# Altium PCB PCB1.pcbdoc
Units mil, origin at the board's own origin, x right, y up, seen from the top; angles counter-clockwise.
Board outline 1574.8 x 1574.8 mil, 2 copper layers (Top Layer, Bottom Layer), stack 62.2 mil thick; 42 components, 24 nets, 130 pads, 97 vias.
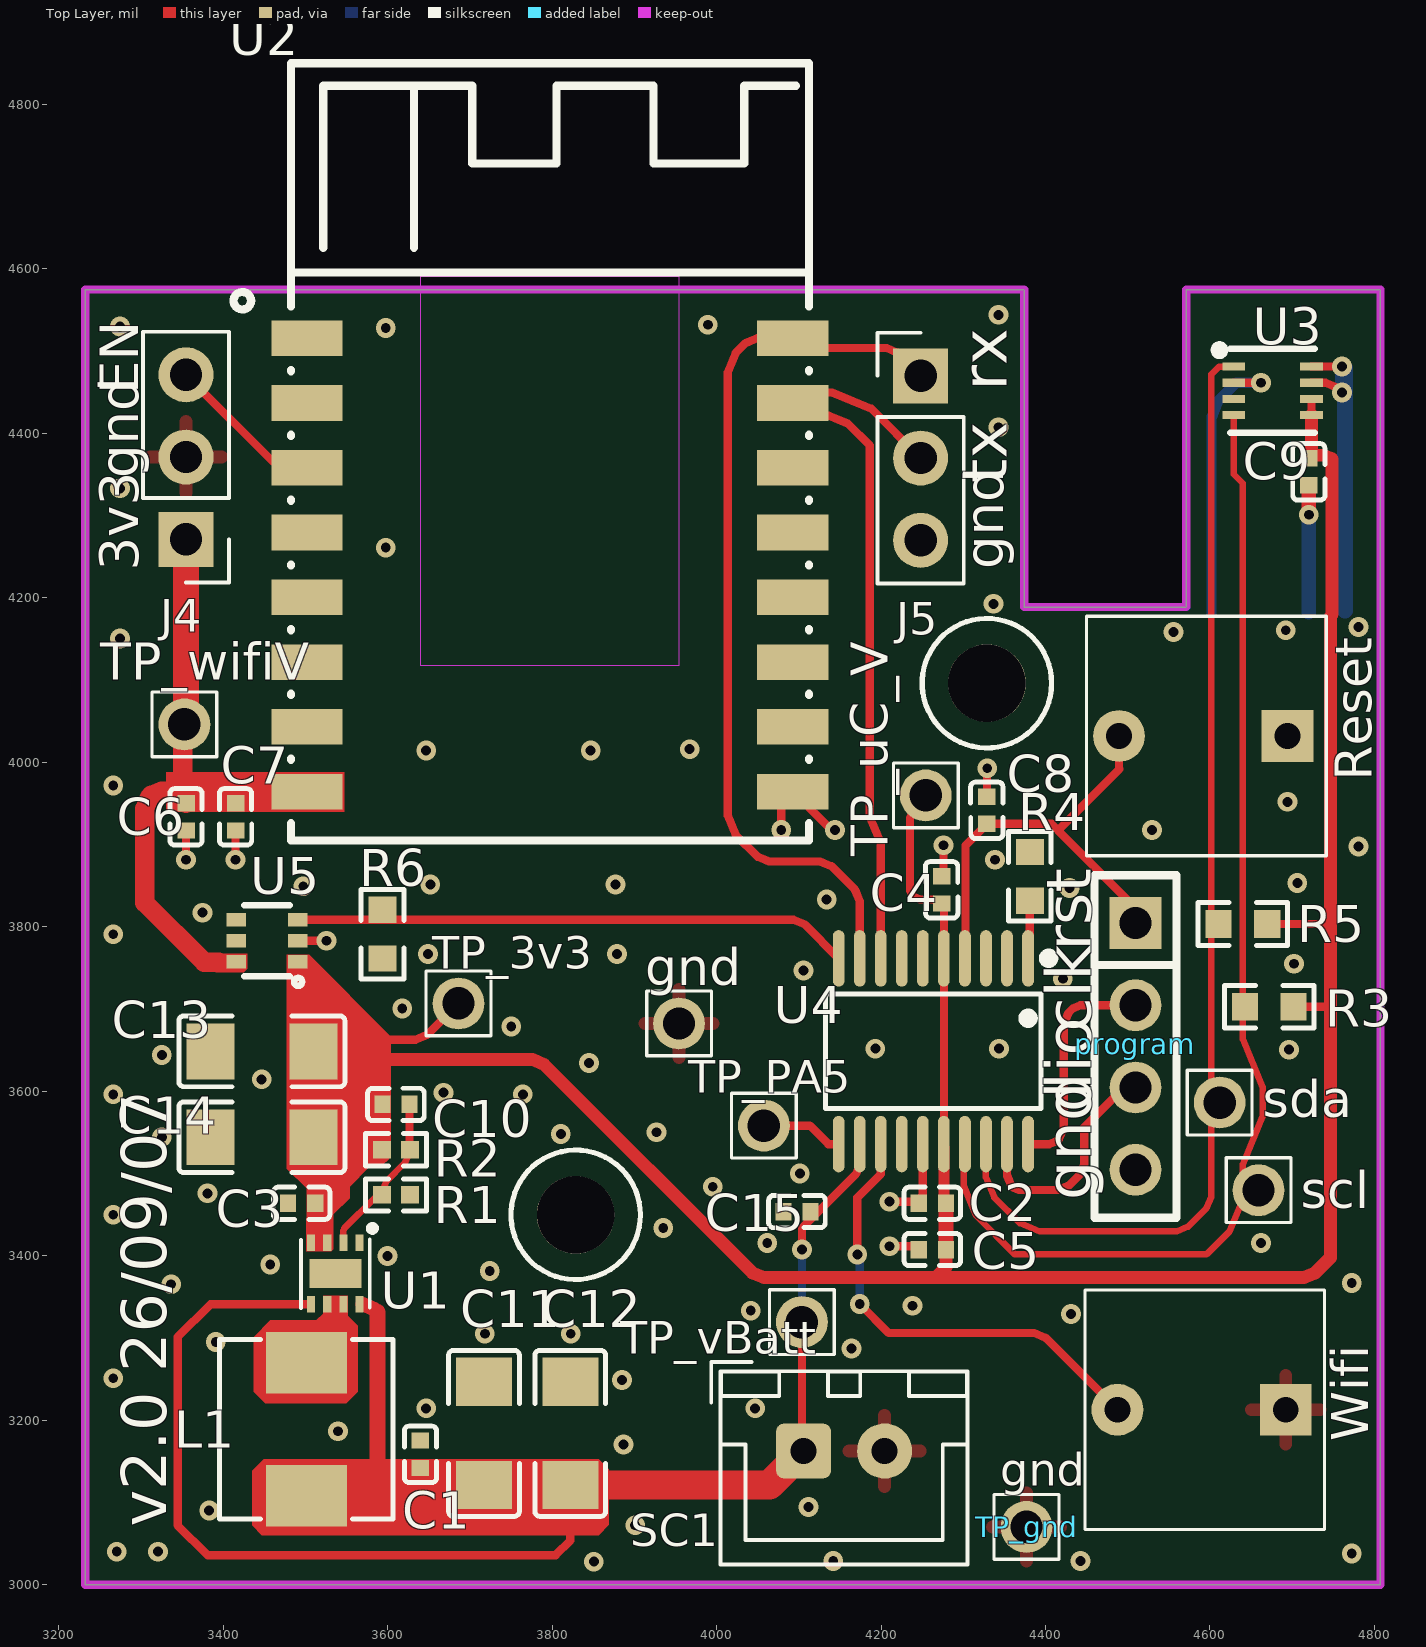
[diagram p0: Top Layer view]
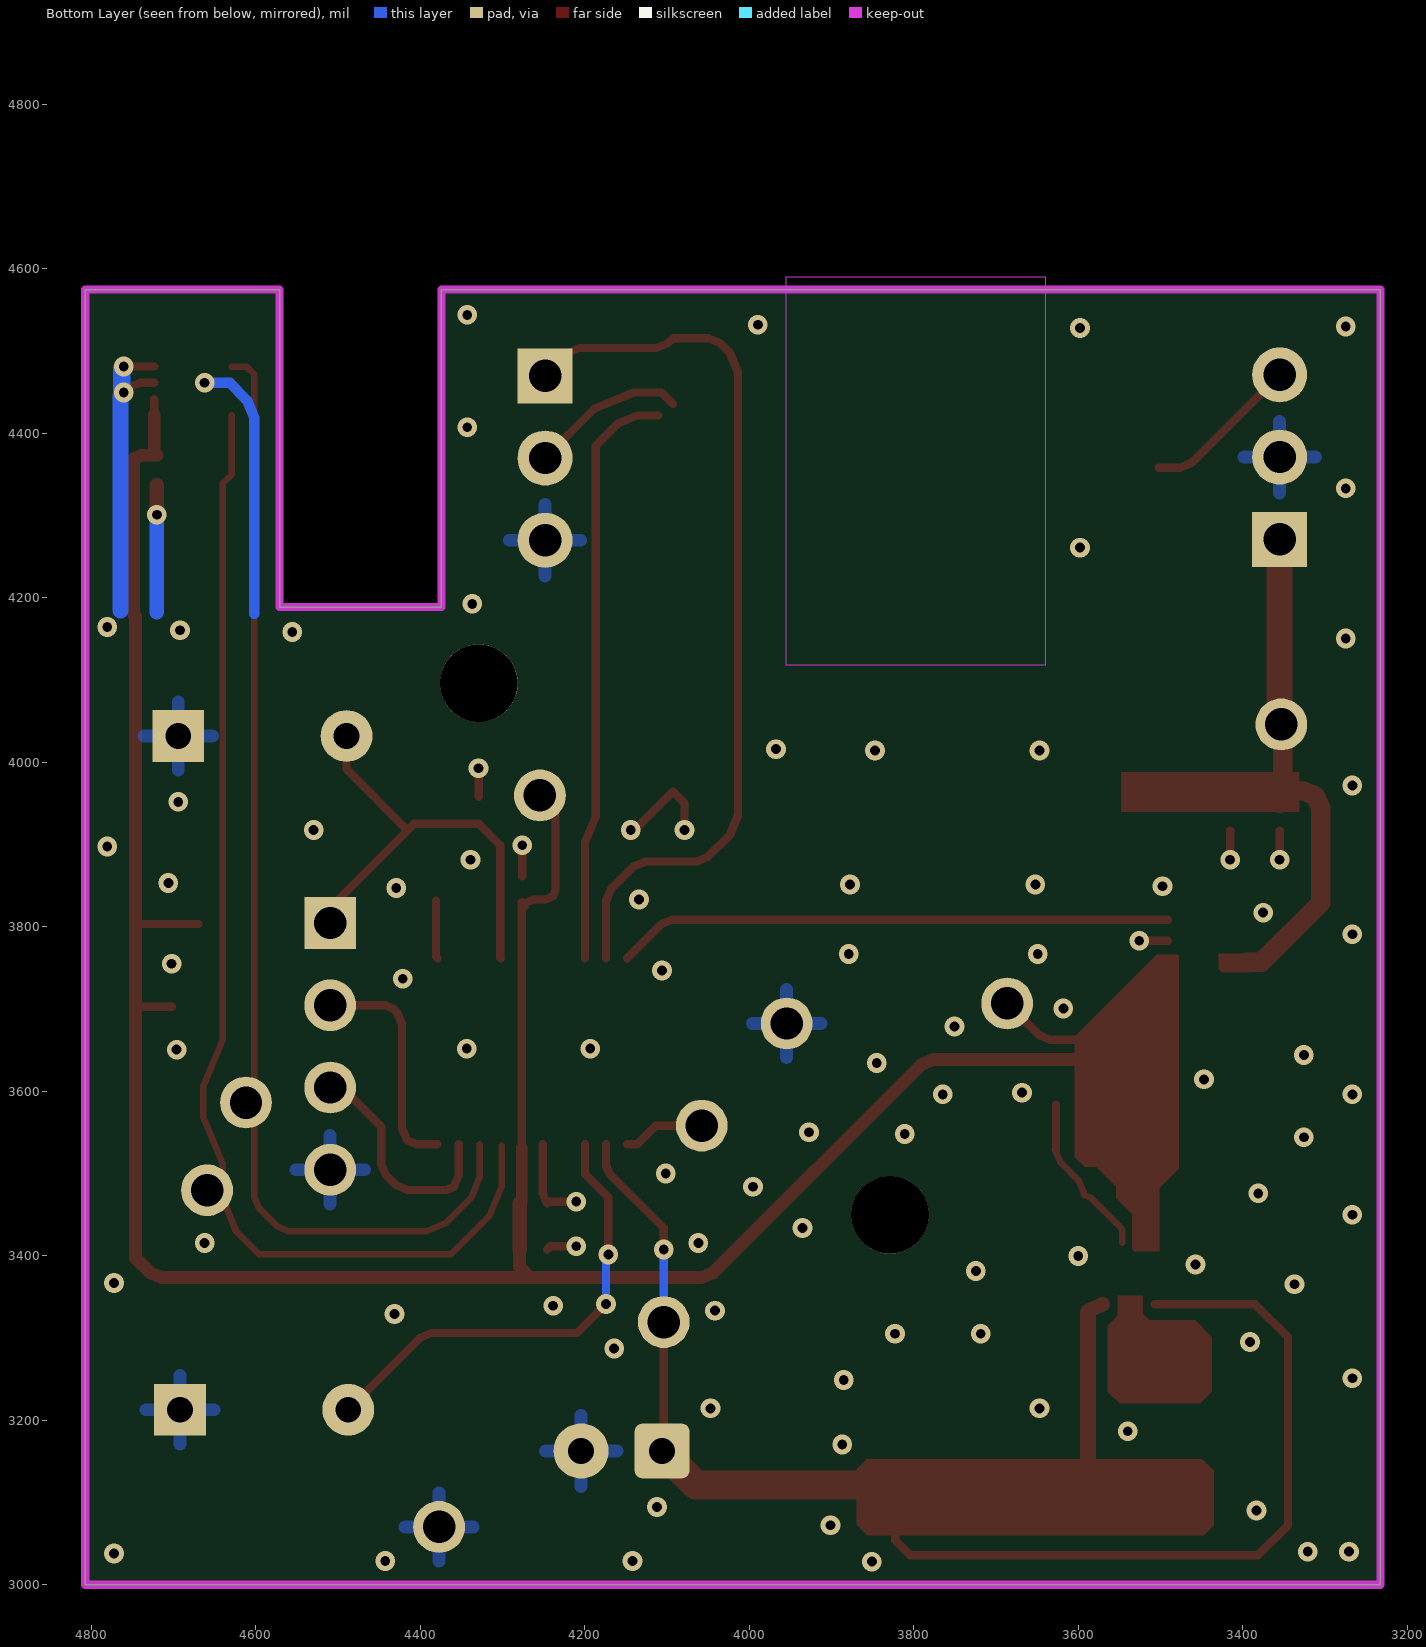
[diagram p1: Bottom Layer view, seen from below]

## Layer stack, top to bottom
Top Solder Mask Layer: solder mask 0.4, Dk 3.3
Top Layer: signal copper 1.4
Dielectric1: surface 59.4, FR4, Dk 4.5
Bottom Layer: signal copper 1.4
Bottom Solder Mask Layer: solder mask 0.4, Dk 3.3

## Board outline
4807.2,4574.8 4807.2,3000 3232.4,3000 3232.4,4574.8 4374.1,4574.8 4374.1,4188.8 4571,4188.8 4571,4574.8

## Design rules (kind name [scope] priority, off if disabled: settings)
BoardOutlineClearance copperThickness1oz [All] p0: genericclearance=10 ignorepadtopadclearanceinfootprint=FALSE except(0: Arc-SplitContinuation Track-SplitContinuation SMDPad-SplitContinuation THPad-SplitContinuation Via-SplitContinuation Fill-SplitContinuation Poly-SplitContinuation Region-SplitContinuation Text-SplitContinuation)
BoardOutlineClearance copperThickness2oz [All] p0: genericclearance=10 ignorepadtopadclearanceinfootprint=FALSE except(0: Arc-SplitContinuation Track-SplitContinuation SMDPad-SplitContinuation THPad-SplitContinuation Via-SplitContinuation Fill-SplitContinuation Poly-SplitContinuation Region-SplitContinuation Text-SplitContinuation)
BoardOutlineClearance otherClearance [All] p0: genericclearance=10 ignorepadtopadclearanceinfootprint=FALSE except(0: Arc-SplitContinuation Track-SplitContinuation SMDPad-SplitContinuation THPad-SplitContinuation Via-SplitContinuation Fill-SplitContinuation Poly-SplitContinuation Region-SplitContinuation Text-SplitContinuation)
Clearance copperThickness1oz [All] p1: gap=7 ignorepadtopadclearanceinfootprint=FALSE
Clearance copperThickness2oz [All] p1: gap=7 ignorepadtopadclearanceinfootprint=FALSE
Clearance otherClearance [All] p1: gap=7 ignorepadtopadclearanceinfootprint=FALSE
DiffPairsRouting differentialPair [All] p1: maxuncoupledlength=10 minlimit=6 maxlimit=Infinity mostfreqgap=6 toplayer_minwidth=5 toplayer_prefwidth=10 toplayer_maxwidth=100 bottomlayer_minwidth=5 bottomlayer_prefwidth=10 bottomlayer_maxwidth=100
PasteMaskExpansion pasteMaskExpansion [All] p1: expansion=0
PlaneConnect innerPlane [All] p1: planeconnectstyle=Relief reliefexpansion=20 reliefentries=4 reliefconductorwidth=10 reliefairgap=10
PolygonConnect copperRegion [All] p1: connectstyle=Relief reliefentries=4 reliefconductorwidth=15.748 polygonreliefangle="90 Angle" airgapwidth=10
RoutingVias viaSize [All] p1: viastyle="Through Hole" holewidth=12.0078 minholewidth=11.811 maxholewidth=248.0314 width=12.0078 minwidth=11.811 maxwidth=248.0314
SolderMaskExpansion solderMaskExpansion [IsVia] p1: useseparateexpansions=TRUE expansion=-1000 expansionbottom=-1000
SolderMaskExpansion solderMaskExpansion [All] p2: useseparateexpansions=TRUE expansion=2 expansionbottom=2
Width copperThickness1oz [All] p1: maxlimit=100 minlimit=5 preferedwidth=10
Width copperThickness2oz [All] p1: maxlimit=100 minlimit=8 preferedwidth=10

## Components (designator, comment, footprint, x,y, rotation, side; value= is the part's Value field where it differs from the comment)
C1 "10uF" C0402#1 3640,3158.6 r270 top
C2 "100nF" C0402#2 4262.4,3463.8 r0 top
C3 "10uF" C0402#2 3495.4,3463.8 r0 top
C4 "100nF" C0402#1 4273.7,3844.9 r270 top
C5 "10uF" C0402#2 4262.4,3407.6 r0 top
C6 "10uF" C0402#1 3354.9,3933.7 r90 top
C7 "100nF" C0402#1 3415.1,3933.7 r90 top
C8 "100nF" C0402#3 4328.7,3941.7 r270 top
C9 "100nF" C0402#3 4720.2,4353.3 r90 top
C10 "50pF" C0402#3 3610.2,3584 r180 top
C11 "47uF" C1206 3717.2,3184.1 r270 top
C12 "47uF" C1206 3822.2,3184.1 r270 top
C13 "47uF" C1206 3447.2,3648.5 r0 top
C14 "47uF" C1206 3447.2,3544.1 r0 top
C15 "100nF" C0402#3 4097.8,3453.8 r0 top
gnd "" HDR-TH_1P-P2.54-V-F 3954.3,3682.4 r0 top
J4 "Connector_Generic_Conn_01x03" Connector_PinHeader_2.54mm:PinHeader_1x03_P2.54mm_Vertical 3354.9,4271.2 r180 top
J5 "Connector_Generic_Conn_01x03" Connector_PinHeader_2.54mm:PinHeader_1x03_P2.54mm_Vertical 4248.1,4470 r0 top
L1 "470nH" IND-SMD_L5.4-W5.2 3501.2,3189 r270 top
program "DS1023-1*4S21" HDR-TH_DS1023-1X4S21 4509.4,3654.6 r270 top
R1 "200kΩ" R0402 3610.2,3474 r180 top
R2 "634kΩ" R0402 3610.2,3529 r180 top
R3 "10kΩ" R0603#1 4672,3702.8 r0 top
R4 "10kΩ" R0603#1 4380.9,3861.4 r270 top
R5 "10kΩ" R0603#1 4639.9,3803.4 r0 top
R6 "10kΩ" R0603#2 3593.8,3791.1 r90 top
Reset "Switch_SW_Push" water_tank:SW_PUSH 4694.1,4032 r180 top
SC1 "Device_Solar_Cell" water_tank:JST_XH_B2B-XH-A_1x02_P2.50mm_Vertical 4105.8,3162.6 r0 top
scl "" HDR-TH_1P-P2.54-V-F 4659,3479.7 r0 top
sda "" HDR-TH_1P-P2.54-V-F 4611.8,3586.3 r0 top
TP_3v3 "" HDR-TH_1P-P2.54-V-F 3686.2,3706.8 r0 top
TP_gnd "" HDR-TH_1P-P2.54-V-F 4376.9,3070.3 r0 top
TP_PA5 "" HDR-TH_1P-P2.54-V-F 4057.6,3558.2 r0 top
TP_uC_V "" HDR-TH_1P-P2.54-V-F 4254.4,3959.8 r0 top
TP_vBatt "" HDR-TH_1P-P2.54-V-F 4103.8,3319.3 r0 top
TP_wifiV "" HDR-TH_1P-P2.54-V-F 3352.9,4046.1 r0 top
U1 "TPS61021ADSGR" WSON-8_L2.0-W2.0-P0.50-TL-EP 3536.5,3378.4 r270 top
U2 "" T3-3S-footprint 3797.4,4240 r0 top
U3 "HDC3020DEFR" DFN-8_L2.5-W2.5-P0.50-BL-EP 4676.1,4451.7 r270 top
U4 "STM32L010F4P6" TSSOP-20_L6.5-W4.4-P0.65-LS6.4-BL 4263.6,3648.7 r180 top
U5 "TPS22919QDCKRQ1" SC-70-6_L2.0-W1.3-P0.65-LS2.1-BR 3453.3,3783.1 r0 top
Wifi "Switch_SW_Push" water_tank:SW_PUSH 4692.1,3212.8 r180 top

## Footprints (in the part's own frame and the unit in brackets; to place one, negate y for a bottom-side part, rotate by r counter-clockwise, add the part's x,y. Pads: shape width x height; smd on the part's side, far side on the other; paste and mask are expansions set on the pad)
C0402#1 [mil]
  rect 19.7x21.3 smd: 1(-16.6,0) 2(16.5,0)
  silkscreen extent -34,-20 34,20
C0402#2 [mil]
  rect 19.7x21.3 smd: 1(-16.5,0) 2(16.6,0)
  silkscreen extent -34,-20 34,20
C0402#3 [mil]
  rect 19.7x21.3 smd: 1(-16.5,0) 2(16.5,0)
  silkscreen extent -34,-20 34,20
C1206 [mil]
  rect 58.5x68 smd paste-3937 mask+2: 1(-62.7,0) 2(62.7,0)
  silkscreen extent -101,-43 101,43
Connector_PinHeader_2.54mm:PinHeader_1x03_P2.54mm_Vertical [mil]
  rect 66.9x66.9 hole 39.4 paste+0 mask+0: 1(0,0)
  round 66.9 hole 39.4 paste+0 mask+0: 2(0,-100) 3(0,-200)
  silkscreen extent -52,-252 52,52
DFN-8_L2.5-W2.5-P0.50-BL-EP [mil]
  rect 9.8x27.6 smd: 1(-29.5,-47.3) 2(-9.8,-47.3) 3(9.8,-47.3) 4(29.5,-47.3) 5(29.5,47.2) 6(9.8,47.2) 7(-9.8,47.2) 8(-29.5,47.2)
  silkscreen extent -55,-70 51,51
HDR-TH_1P-P2.54-V-F [mil]
  round 63 hole 39.4 paste+0 mask+2: 1(0,0)
  silkscreen extent -39,-39 39,39
HDR-TH_DS1023-1X4S21 [mil]
  rect 63x63 hole 39.4: 1(-150,0)
  round 63 hole 39.4: 2(-50,0) 3(50,0) 4(150,0)
  silkscreen extent -208,-50 208,50
IND-SMD_L5.4-W5.2 [mil]
  rect 74.8x98.4 smd: 1(80.7,0) 2(-80.7,0)
  silkscreen extent -109,-105 109,105
R0402 [mil]
  rect 22.3x21.3 smd paste-3937 mask+2: 1(-17,0) 2(17,0)
  silkscreen extent -37,-20 37,20
R0603#1 [mil]
  rect 31.8x34 smd paste-3937 mask+2: 1(-29.6,0) 2(29.7,0)
  silkscreen extent -54,-26 55,26
R0603#2 [mil]
  rect 31.8x34 smd paste-3937 mask+2: 1(-29.7,0) 2(29.7,0)
  silkscreen extent -54,-26 54,26
SC-70-6_L2.0-W1.3-P0.65-LS2.1-BR [mil]
  rect 23.6x16.5 smd: 1(37.4,-25.6) 2(37.4,0) 3(37.4,25.6) 4(-37.4,25.6) 5(-37.4,0) 6(-37.4,-25.6)
  silkscreen extent -28,-55 43,43
T3-3S-footprint [mil]
  rect 86.6x43.3 smd paste+0 mask+2: 1(-295.3,275.6) 2(-295.3,196.9) 3(-295.3,118.1) 4(-295.3,39.4) 5(-295.3,-39.4) 6(-295.3,-118.1) 7(-295.3,-196.9) 8(-295.3,-275.6) 9(295.3,-275.6) 10(295.3,-196.9) 11(295.3,-118.1) 12(295.3,-39.4) 13(295.3,39.4) 14(295.3,118.1) 15(295.3,196.9) 16(295.3,275.6)
  Board Outline Layer region: -157.5,350.4 -157.5,-122 157.5,-122 157.5,350.4
  silkscreen extent -385,-335 315,610
TSSOP-20_L6.5-W4.4-P0.65-LS6.4-BL [mil]
  oval 14.3x68.6 smd: 1(-115.2,-113) 2(-89.6,-113) 3(-64,-113) 4(-38.4,-113) 5(-12.8,-113) 6(12.8,-113) 7(38.4,-113) 8(63.9,-113) 9(89.5,-113) 10(115.1,-113) 11(115.1,113) 12(89.5,113) 13(63.9,113) 14(38.4,113) 15(12.8,113) 16(-12.8,113) 17(-38.4,113) 18(-64,113) 19(-89.6,113) 20(-115.2,113)
  silkscreen extent -146,-119 131,70
water_tank:JST_XH_B2B-XH-A_1x02_P2.50mm_Vertical [mil]
  rrect29% 66.9x66.9 hole 31.5 paste+0 mask+0: 1(0,0)
  round 66.9 hole 31.5 paste+0 mask+0: 2(98.5,0)
  silkscreen extent -112,-138 199,108
water_tank:SW_PUSH [mil]
  rect 63x63 hole 31.5 paste+0 mask+0: 1(0,0)
  round 63 hole 31.5 paste+0 mask+0: 2(204.7,0)
  silkscreen extent -47,-146 244,146
WSON-8_L2.0-W2.0-P0.50-TL-EP [mil]
  rect 20.5x9.8 smd paste+0 mask+2: 1(-37.4,29.5) 2(-37.4,9.8) 3(-37.4,-9.9) 4(-37.4,-29.6) 5(37.4,-29.6) 6(37.4,-9.9) 7(37.4,9.8) 8(37.4,29.5)
  rect 35.4x63 smd paste+0 mask+2: 9(0,0)
  silkscreen extent -58,-42 42,48

## Free pads (board coordinates)
  round 94.5 hole 94.5 unplated: 1(3828.7,3449.8) 1(4328.7,4096.2)

## Via types
v1: diameter 24, hole 12, Top Layer to Bottom Layer, 97 vias

## Nets (pads, with @x,y where several pads share a name; then routed paths per layer and width w, separated by ;. In a path a pad name is that pad's centre, name@x,y a point inside that pad or via, vN(x,y) a via of type N, cw(c..) or ccw(c..) an arc to the next point about the centre after c; other vN are vias at no path point)
$1N30: C6.2 C7.2 J4.1 TP_wifiV.1 U2.8 U5.6 | length 613.5
  Top Layer w23.6: TP_wifiV.1@3350.9,4044.1 3350.9,3965.1 ; C6.2 3354.9,3961.1 3350.9,3965.1 ; 3395,3757 3377,3757 3304.7,3829.3 3304.7,3943.6 3310.5,3957.5 3312.7,3959.8 3325.6,3965.1 3350.9,3965.1
  Top Layer w31.5: TP_wifiV.1 3354.9,4048.1 J4.1
$1N39: R4.2 U4.1 | length 70.8
  Top Layer w10: U4.1 4380.9,3763.9 R4.2
$1N45: J4.3 U2.3 | length 192.8
  Top Layer w10: J4.3 3462.2,4363.9 3476.1,4358.1 U2.3
$1N51: C10.1 R1.2 R2.1 U1.2 | length 201.3
  Top Layer w7.9: U1.2 3546.3,3430.5 3547.6,3433.7 3584.3,3470.3 R1.2 3593.2,3477.1 3598.9,3491 3621.5,3513.6 3627.2,3527.5 R2.1
  Top Layer w10: C10.1 3626.7,3530.2 R2.1
$1N61: L1.2 U1.6 U1.7
$1N79: U4.13 Wifi.2 | length 572.7
  Top Layer w10: v1(4171.2,3401.6) 4171.2,3471 4199.7,3499.4 U4.13 ; v1(4174.1,3341.3) 4209.3,3306.2 4385.9,3306.2 4399.8,3300.4 Wifi.2
  Bottom Layer w10: v1(4171.2,3401.6) 4174.1,3398.7 v1(4174.1,3341.3)
$1N80: TP_PA5.1 U4.11 | length 100.2
  Top Layer w10: TP_PA5.1 4113.4,3558.2 4135.9,3535.7 U4.11
+3V3: C2.2 C3.2 C4.2 C5.2 C9.2 C10.2 C13.2 C14.2 R2.2 R3.2 R5.2 TP_3v3.1 TP_uC_V.1 U1.3 U1.4 U3.5 U3.6 U4.5 U4.16 U5.1 | length 2171.5
  Top Layer w10: 3589.8,3662.6 3633.9,3662.6 ; TP_uC_V.1 4241.1,3946.4 4235.3,3932.5 4235.3,3845.3 4238.8,3836.8 4247.4,3833.3 4262,3833.3 ; U4.5 C4.2@4276.4,3829.8 ; R5.2 4744.3,3803.4 ; R3.2 4740.1,3702.8 4746.3,3709 ; U3.5 U3.6
  Top Layer w13.8: C2.2@4276.5,3465.3 U4.16@4276.5,3531.2 ; C2.2@4277.5,3465.3 C2.2
  Top Layer w15.7: 3790.3,3632.7 4043.8,3379.2 ; 4057.8,3373.5 4266.5,3373.5 ; C9.2@4720.2,4373.4 4738.2,4373.4 4747.8,4369.4 4748.3,4368.9 4748.3,4179.5 4746.3,4177.5 4746.3,3709 4746.3,3397.6 4728,3379.2 ; C9.2@4723.3,4377.3 U3.5
  Top Layer w17.7: C5.2 C2.2
+3v3:  | length 1029.7
  Top Layer w10: 3633.9,3662.6 3647.8,3668.4 3686.2,3706.8 ; 4262,3833.3 4273.7,3828.4 ; 4272.4,3824.9 4274.8,3827.3 4275.9,3828.4 ; 4276.4,3535.7 4276.4,3761.7
  Top Layer w15.7: 3591.8,3638.5 3776.4,3638.5 3790.3,3632.7 ; 4043.8,3379.2 4057.8,3373.5 ; 4279,3407.6 4279,3386 4266.5,3373.5 4714.1,3373.5 4728,3379.2
adc_batt: C1.2 C11.2 C12.2 C15.2 L1.1 SC1.1 TP_vBatt.1 U1.5 U1.8 U4.12 | length 481.5
  Top Layer w10: U1.8 U1.8@3569.9,3341 ; 3583.9,3335.2 3587.8,3331.3 ; TP_vBatt.1 4103.8,3176.7 SC1.1@4111.9,3168.7 ; v1(4103.8,3407.6) 4103.8,3433.7 4169.7,3499.6 4174.1,3510.1 U4.12
  Top Layer w17.7: U1.8@3569.9,3341 3583.9,3335.2
  Top Layer w35.4: 4064.5,3121.4 SC1.1
  Bottom Layer w10: TP_vBatt.1 v1(4103.8,3407.6)
ADC_BATT:  | length 1406
  Top Layer w10: 3506.9,3341 3384.7,3341 3344.8,3301.2 3344.8,3072.3 3381.2,3035.9 3804.4,3035.9 3822.2,3053.7 3822.2,3121.4
  Top Layer w19.7: 3587.8,3142.6 3587.8,3331.3
  Top Layer w35.4: 3822.2,3121.4 4064.5,3121.4
POWER_GNDREF: C1.1 C2.1 C3.1 C4.1 C5.1 C6.1 C7.1 C8.1 C9.1 C11.1 C12.1 C13.1 C14.1 C15.1 J4.2 J5.3 program.4 R1.1 R4.1 Reset.1 SC1.2 U1.1 U1.9 U2.9 U3.2 U3.7 U3.8 U4.15 U5.2 Wifi.1 | length 785.7
  Top Layer w10: v1(4078.6,3917.6) 4078.6,3950.4 U2.9 ; U3.2 v1(4662,4461.5) ; U3.7 4740.4,4461.5 4754.3,4455.8 4760.4,4449.7 ; U3.8 4760.4,4481.2
  Bottom Layer w12.6: 4601.8,4180.6 4601.8,4419.1 4610.6,4440.5 4631.7,4461.5 v1(4662,4461.5)
  Bottom Layer w19.7: 4760.4,4449.7 4764.3,4445.8 4764.3,4184.6
  Bottom Layer w21.7: 4760.4,4449.7 4762.9,4452.2 4762.9,4478.7 4760.4,4481.2
  other v1: 3850.8,3028.1 4141.9,3028.8 4442.5,3028.8 4772.4,3038.1 3270.6,3040.2 3320.7,3040.2 3901,3072.3 3383,3090.4 4111.9,3094.4 3886.8,3170.5 3539.6,3186.7 3646.9,3214.5 4046.9,3214.5 3885,3249 3266.5,3251 4164.1,3287.1 3391,3295.2 3718.3,3305.2 3822.7,3305.2 4431.1,3329.3 4041.6,3333.3 4238.3,3339.3 3336.8,3365.4 4772.4,3366.9 3724.3,3381.5 3457.3,3389.5 3599.8,3399.6 4061.7,3415.6 4662,3415.6 3935.2,3433.7 3266.5,3449.8 3381,3475.9 3995.4,3483.9 3325.5,3544.1 3810.7,3548.1 3927.1,3550.2 3266.5,3596.3 3764.5,3596.3 3668.1,3598.3 3446.9,3614.5 3844.8,3634.5 3325.5,3644.1 4696.1,3650.6 4193.1,3651.8 4343.4,3651.8 3750.4,3678.7 3617.9,3700.7 4421.1,3736.9 4105.8,3746.9 4702.2,3755 3649.1,3767 3878.9,3767 3525.6,3783.1 3266.5,3790.9 3375,3817.2 4133.9,3833.3 4429.1,3847.3 3497.4,3849.3 3652,3851.3 3877.2,3851.3 4706.2,3853.3 4780.5,3897.5 4529.5,3917.6 4694.1,3951.9 3266.5,3971.8 3646.9,4014.5 3846.9,4014.5 3967.3,4016 3274.6,4150.5 4555.6,4158.5 4692.1,4160.6 4780.5,4164.6 4336.7,4192.7 3597.8,4261 3274.6,4333.1 4342.8,4407.5 3597.8,4528 3274.6,4530 3989.4,4532 4342.8,4544.1
power_GNDREF: gnd.1 R6.1 TP_gnd.1 | length 550.2
  Top Layer w10: v1(3354.9,3881.5) 3354.9,3917.1 ; v1(3415.1,3881.5) 3415.1,3917.1 ; 3490.7,3783.1 3525.6,3783.1 ; 4092.7,3964.4 4139.5,3917.6 v1(4144,3917.6) ; v1(4210.2,3411.6) 4241.9,3411.6 4245.9,3407.6 ; v1(4210.2,3465.8) 4243.9,3465.8 4245.9,3463.8 4250.8,3475.7 4250.8,3535.7 ; 4275.9,3861.5 v1(4275.9,3899.2) ; 4328.7,3958.2 4328.7,3992.5 v1(4329.1,3992.8)
  Top Layer w17.7: v1(4720.2,4301.1) 4720.2,4336.8
  Bottom Layer w17.7: 4720.2,4182.6 v1(4720.2,4301.1)
  other v1: 4101.3,3500 4338.7,3881.5 4760.4,4449.7 4760.4,4481.2
SCL: R3.1 scl.1 U3.4 U4.17 | length 1437.2
  Top Layer w7.9: U4.17@4300.6,3533.8 4300.6,3485.2 4315.7,3448.7 4362.8,3401.6 4595.7,3401.6 4623.6,3429.4 4639.9,3468.8 4639.9,3511.4 4664,3569.5 4664,3605.2 4639.9,3663.3 4639.9,4339.3 4628.8,4350.4 U3.4
SDA: R5.1 sda.1 U3.1 U4.18 | length 1396.3
  Top Layer w7.9: U4.18 4327.6,3495.4 4337.8,3470.8 4368.9,3439.7 4393.1,3429.7 4559.5,3429.7 4573.4,3435.5 4596,3458.1 4601.8,3472 4601.8,4471.8 4611.2,4481.2 U3.1
SWCLK: program.2 U4.20 | length 279.8
  Top Layer w10: U4.20 4404.3,3535.7 4415,3540.1 4416.3,3541.4 4422.1,3555.3 4422.1,3681.6 4427.9,3695.5 4433.1,3700.7 4442.3,3704.6 program.2
SWDIO: program.3 U4.19 | length 284.3
  Top Layer w10: U4.19 4353.2,3497.7 4359,3483.7 4368.3,3479.9 4414.9,3479.9 4428.8,3485.6 4441.9,3498.7 4447.2,3511.5 4447.2,3556.5 4495.3,3604.6 program.3
uC_reset: C8.2 program.1 Reset.2 U4.4 | length 302.3
  Top Layer w10: U4.4 4302.6,3762.3 4302.6,3899.1 C8.2 4407.5,3925.2 4413.5,3919.1 ; Reset.2 4489.4,3992 4489.7,3991.8
UC_RESET:  | length 257
  Top Layer w10: 4489.7,3991.8 4415.2,3917.2 4509.4,3823 4509.4,3804.6
Wifi_On: R6.2 U4.10 U5.3 | length 676
  Top Layer w10: U5.3 4093.4,3808.7 4107.3,3802.9 U4.10
Wifi_Rx: J5.1 U2.16 U4.9 | length 99.6
  Top Layer w10: 4125.8,3879.4 4139.7,3873.7 ; 4168.3,3845.1 4174.1,3831.2 U4.9
WIFI_RX:  | length 992.3
  Top Layer w10: 4125.8,3879.4 4063.8,3879.4 4049.9,3885.2 4023.2,3911.8 4013.5,3935.4 4013.5,4474 4023.2,4497.6 4035.4,4509.8 4049.4,4515.6 4092.7,4515.6 4098.6,4509.7 4112.5,4503.9 4206.1,4503.9 4220,4498.1 4248.1,4470 ; 4139.7,3873.7 4168.3,3845.1
Wifi_Tx: J5.2 U2.15 U4.8 | length 166.3
  Top Layer w10: U2.15@4110.5,4421.6 4136.5,4421.6 ; U4.8 4199.7,3902
WIFI_TX:  | length 738.8
  Top Layer w10: 4092.7,4435.6 4106.7,4449.7 4140.4,4449.7 4188.3,4429.9 4248.1,4370 ; 4136.5,4421.6 4159.5,4412 4186.4,4385.2 4186.4,3934 4199.7,3902
pads on no net: U2.1 U2.2 U2.4 U2.5 U2.6 U2.7 U2.10 U2.11 U2.12 U2.13 U2.14 U3.3 U4.2 U4.3 U4.6 U4.7 U4.14 U5.4 U5.5

## Polygon pours and split planes (outlines as drawn)
POWER_GNDREF on Top Layer (solid, remove dead copper, pour order 0): 3232.4,4574.8 4374.1,4574.8 4374.1,4188.8 4807.2,4188.8 4807.2,3000 3232.4,3000
POWER_GNDREF on Bottom Layer (solid, pour order 2): 3232.4,4574.8 4369.5,4574.8 4370.9,4576.2 4374.1,4572.9 4374.1,4188.8 4807.2,4188.8 4807.2,3000 3232.4,3000 3232.4,4574.2 3233,4573.6 3233,4574.2

## Keep-outs
Board Outline Layer:
  the board outline again, w10

## Other copper
Top Layer:
  region net $1N61: 3521.5,3351.4 3551.7,3351.4 3551.7,3327.3 3563.7,3315.2 3563.7,3234.9 3549.6,3220.9 3451.3,3220.9 3437.2,3234.9 3437.2,3301.2 3457.3,3321.3 3513.5,3321.3 3521.5,3329.3
  region net ADC_BATT: 3449.3,3152.6 3856.9,3152.6 3869.2,3140.3 3869.2,3072.8 3856.6,3060.2 3447.2,3060.2 3435.2,3072.3 3435.2,3138.5
  region net +3V3: 3477.4,3765.9 3504.6,3765.9 3603.9,3666.6 3603.9,3520 3591.9,3508 3577.8,3508 3553.7,3483.9 3553.7,3470 3533.9,3450.2 3533.9,3407.9 3531.6,3405.6 3501.3,3405.6 3501.3,3445.6 3501.5,3445.7 3501.5,3481.9 3477.4,3506
  region net $1N30: 3330.8,3987.9 3330.8,3939.7 3547.6,3939.7 3547.6,3987.9
  region net $1N30: 3429.2,3767 3429.2,3748.9 3425.2,3744.9 3391,3744.9 3388.8,3747.2 3388.8,3766.8 3389,3767

## Silkscreen, mask and mechanical layers (free items; w line width, h text height)
Top Silkscreen Layer:
  lines w6.3: 3750.1,3445.8 3750.9,3438 3752.4,3430.3 3754.7,3422.8 3757.8,3415.6 3761.6,3408.7 3766,3402.2 3771,3396.2 3776.6,3390.7 3782.8,3385.8 3789.4,3381.6 3796.4,3378 3803.7,3375.1 3811.2,3373 3818.9,3371.6 3826.8,3371 3834.6,3371.2 3842.4,3372.2 3850.1,3374 3857.5,3376.5 3864.7,3379.7 3871.5,3383.6 3877.8,3388.2 3883.7,3393.4 3889.1,3399.2 3893.8,3405.4 3897.9,3412.1 3901.3,3419.2 3904,3426.6 3905.9,3434.2 3907.1,3441.9 3907.5,3449.8 3907.1,3457.6 3905.9,3465.4 3904,3473 3901.3,3480.3 3897.9,3487.4 3893.8,3494.1 3889.1,3500.4 3883.7,3506.1 3877.8,3511.3 3871.5,3515.9 3864.7,3519.8 3857.5,3523.1 3850.1,3525.6 3842.4,3527.3 3834.6,3528.3 3826.8,3528.5 3818.9,3527.9 3811.2,3526.5 3803.7,3524.4 3796.4,3521.5 3789.4,3518 3782.8,3513.7 3776.6,3508.8 3771,3503.3 3766,3497.3 3761.6,3490.8 3757.8,3483.9 3754.7,3476.7 3752.4,3469.2 3750.9,3461.5 3750.1,3453.7 3750.1,3445.8 ; 4250.1,4092.3 4250.8,4084.5 4252.4,4076.8 4254.7,4069.3 4257.8,4062.1 4261.5,4055.2 4265.9,4048.7 4271,4042.7 4276.6,4037.2 4282.7,4032.3 4289.3,4028 4296.3,4024.4 4303.6,4021.6 4311.2,4019.5 4318.9,4018.1 4326.7,4017.5 4334.6,4017.7 4342.4,4018.7 4350,4020.4 4357.5,4022.9 4364.6,4026.2 4371.4,4030.1 4377.8,4034.7 4383.7,4039.9 4389,4045.6 4393.8,4051.9 4397.9,4058.6 4401.3,4065.6 4403.9,4073 4405.9,4080.6 4407,4088.4 4407.4,4096.2 4407,4104.1 4405.9,4111.8 4403.9,4119.4 4401.3,4126.8 4397.9,4133.9 4393.8,4140.6 4389,4146.8 4383.7,4152.6 4377.8,4157.8 4371.4,4162.4 4364.6,4166.3 4357.5,4169.5 4350,4172 4342.4,4173.8 4334.6,4174.7 4326.7,4174.9 4318.9,4174.3 4311.2,4173 4303.6,4170.9 4296.3,4168 4289.3,4164.4 4282.7,4160.2 4276.6,4155.3 4271,4149.8 4265.9,4143.8 4261.5,4137.3 4257.8,4130.4 4254.7,4123.1 4252.4,4115.6 4250.8,4108 4250.1,4100.1 4250.1,4092.3
  text "rx" at 4352.8,4451.7 h55.1 r90
  text "EN" at 3296.7,4447.7 h47.2 r90
  text "gnd" at 3296.7,4345.3 h47.2 r90
  text "tx" at 4352.8,4339.3 h55.1 r90
  text "gnd" at 4348.8,4234.8 h47.2 r90
  text "3v3" at 3296.7,4232.8 h47.2 r90
  text "rst" at 4455.2,3771 h55.1 r90
  text "clk" at 4455.2,3672.6 h55.1 r90
  text "dio" at 4455.2,3574.3 h55.1 r90
  text "gnd" at 4455.2,3467.8 h55.1 r90
  text "gnd" at 4344.8,3120.5 h39.4
  text "v2.0 26/09/07" at 3330.8,3070.3 h55.1 r90
Document Layer:
  lines w10: 3291.5,3059.1 3291.5,4515.7 4748.1,4515.7 4748.1,3059.1 3291.5,3059.1

## Dimensions
3000,3000 to 3000,4574.8 on Document Layer
3232.4,5195 to 4807.2,5195 on Document Layer